# Altium PCB schematic.PcbDoc
Units mil, origin at the board's own origin, x right, y up, seen from the top; angles counter-clockwise.
Board outline 2165.35 x 2362.2 mil, 2 copper layers (Top, Bottom); 42 components, 51 nets, 219 pads, 216 vias.
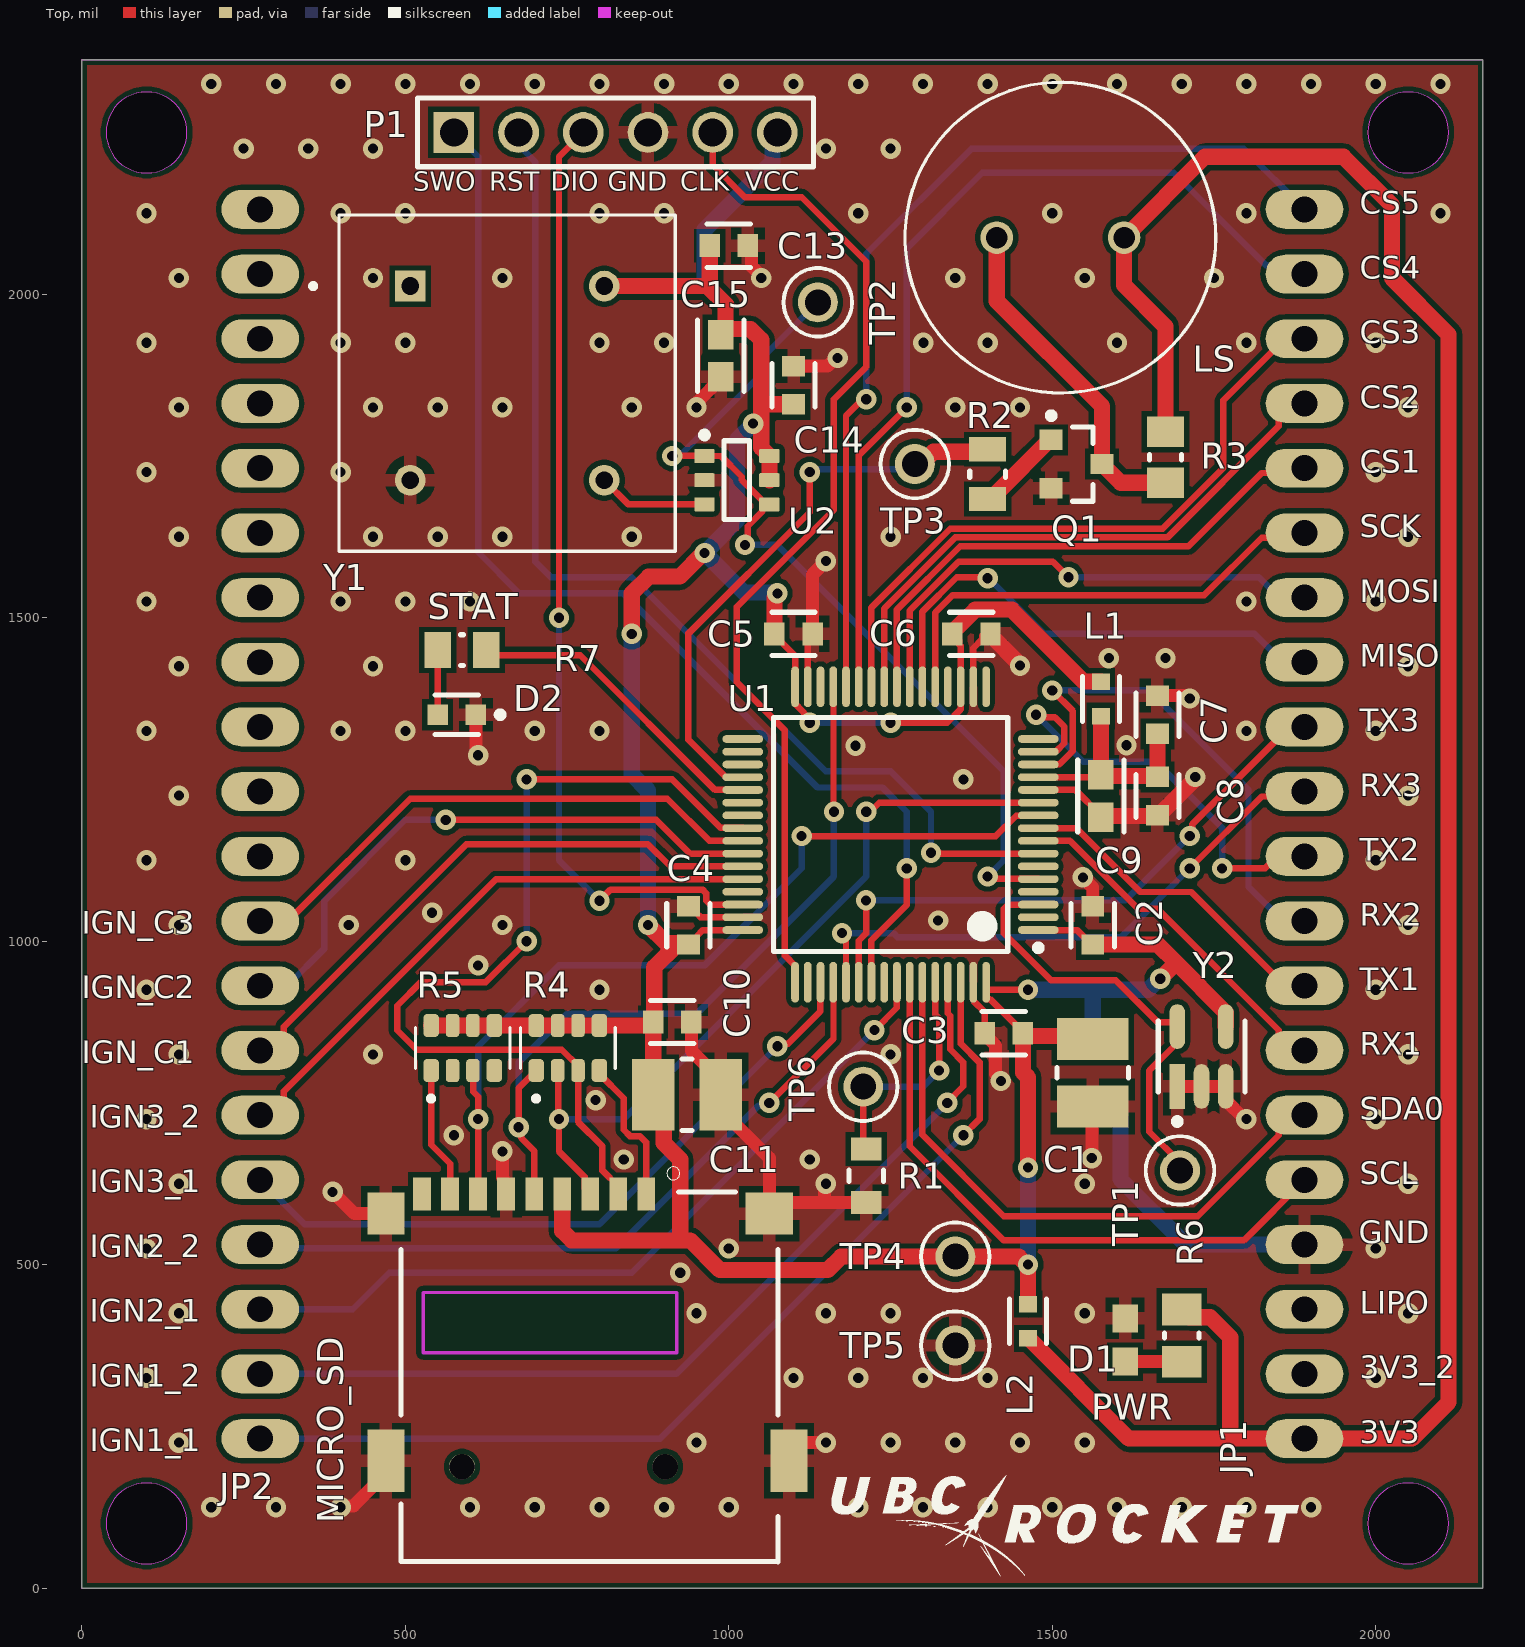
[diagram p0: Top view]
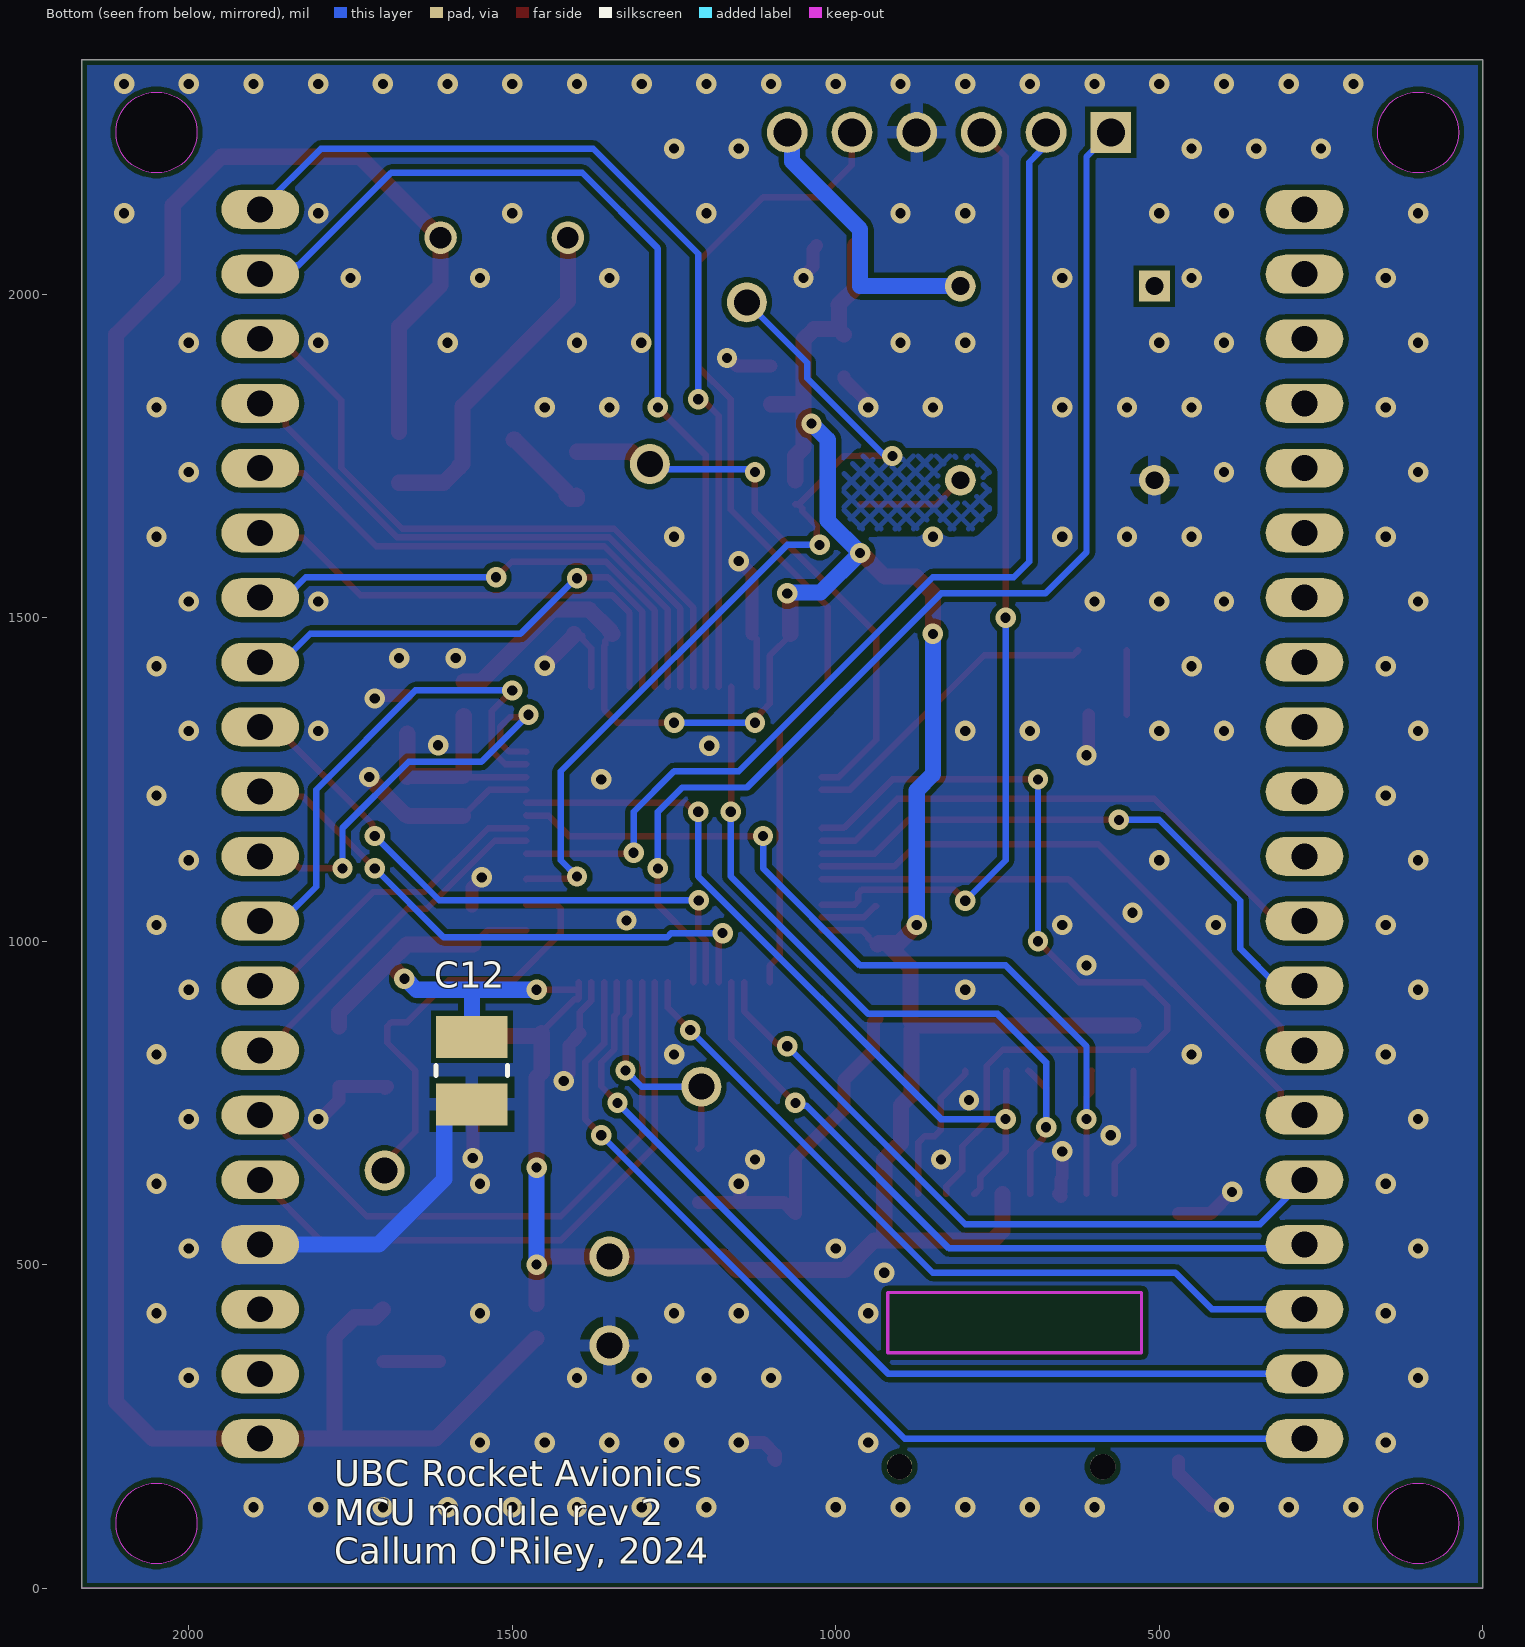
[diagram p1: Bottom view, seen from below]
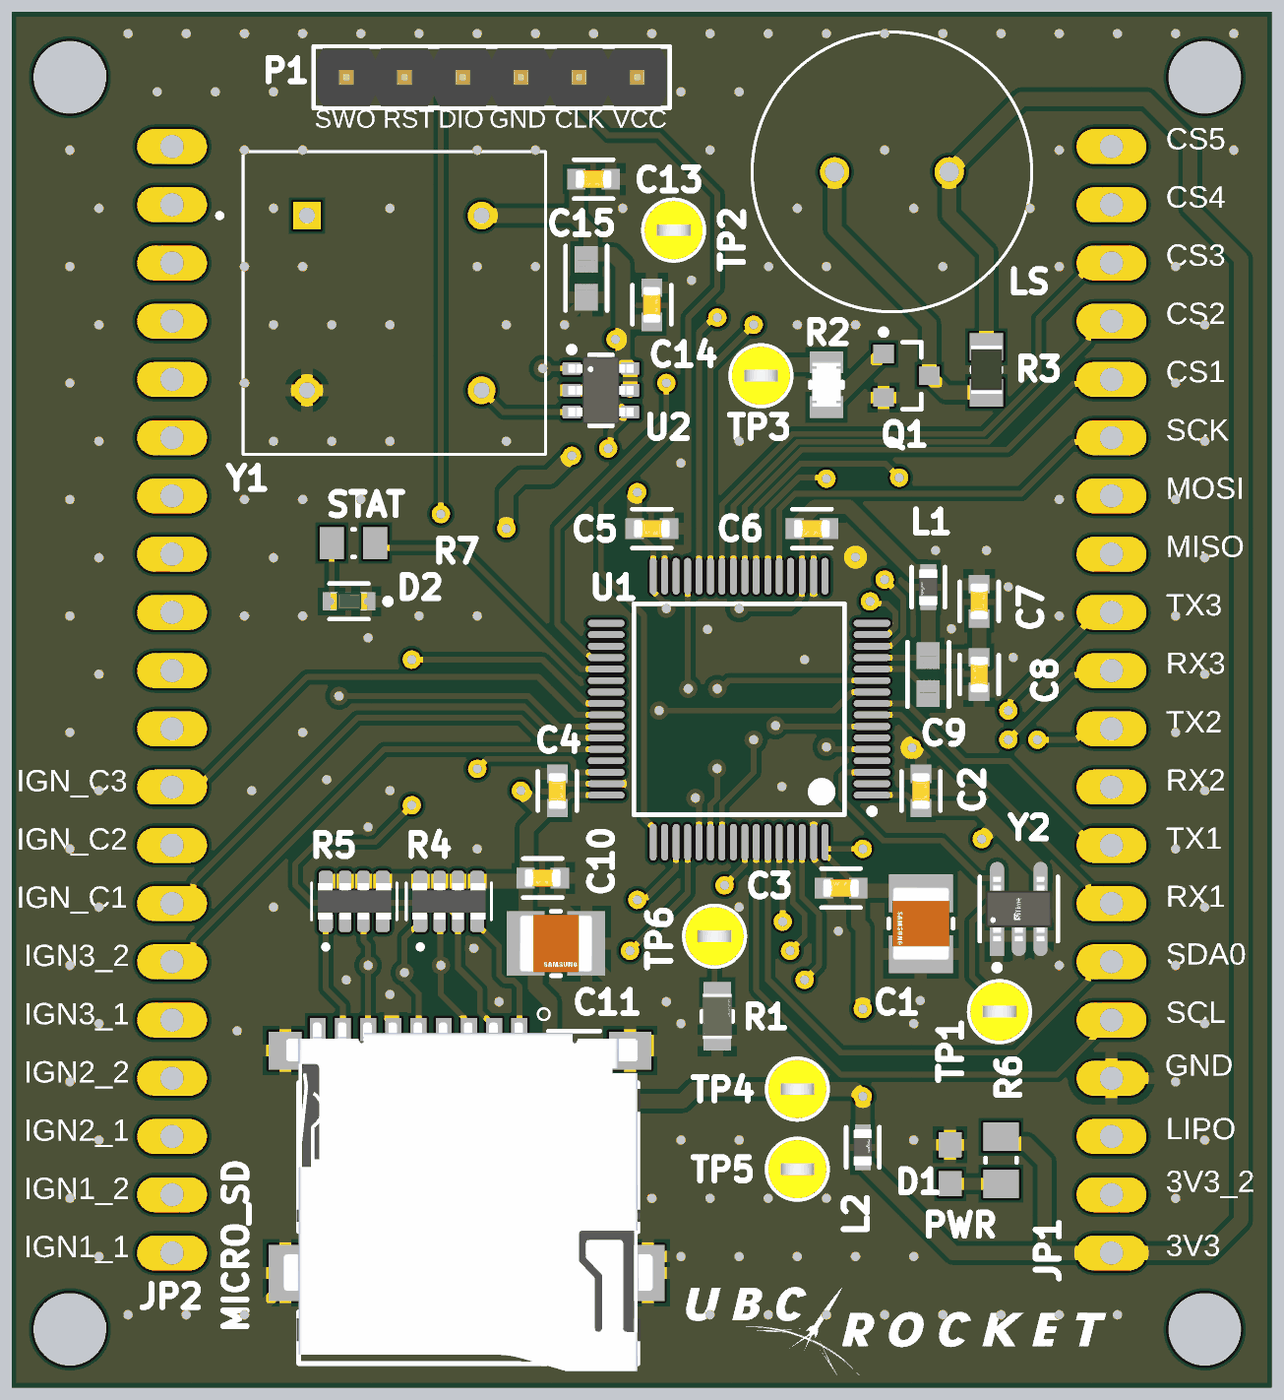
[diagram p2: 3D render of the assembled board from above, using the file's embedded part models]

## Layer stack, top to bottom
Top Solder: solder mask 0.4, Solder Resist, Dk 3.5
Top: signal copper 1.378
Dielectric 1: dielectric 12.6, FR-4, Dk 4.8
Bottom: signal copper 1.378
Bottom Solder: solder mask 0.4, Solder Resist, Dk 3.5

## Board outline
0,2362.2 0,0 2165.35,0 2165.35,2362.2
cut-out: 2050,2187.5 ccw(c2050,2250) 2112.5,2250 ccw(c2050,2250) 2050,2312.5 ccw(c2050,2250) 1987.5,2250 ccw(c2050,2250)
cut-out: 100,2187.5 ccw(c100,2250) 162.5,2250 ccw(c100,2250) 100,2312.5 ccw(c100,2250) 37.5,2250 ccw(c100,2250)
cut-out: 100,37.5 ccw(c100,100) 162.5,100 ccw(c100,100) 100,162.5 ccw(c100,100) 37.5,100 ccw(c100,100)
cut-out: 2050,37.5 ccw(c2050,100) 2112.5,100 ccw(c2050,100) 2050,162.5 ccw(c2050,100) 1987.5,100 ccw(c2050,100)

## Design rules (kind name [scope] priority, off if disabled: settings)
BoardOutlineClearance [All] p1: gap=7.87 ignorepadtopadclearanceinfootprint=FALSE except(15.75: Arc-SplitBarrior Arc-SplitContinuation Track-SplitBarrior Track-SplitContinuation SMDPad-SplitBarrior SMDPad-SplitContinuation THPad-SplitBarrior THPad-SplitContinuation Via-SplitBarrior Via-SplitContinuation Fill-SplitBarrior Fill-SplitContinuation Poly-SplitBarrior Poly-SplitContinuation Region-SplitBarrior Region-SplitContinuation Text-SplitBarrior Text-SplitContinuation)
Clearance "Clearance Bottom Layer" [OnLayer('Bottom Layer')] p1: gap=8 ignorepadtopadclearanceinfootprint=TRUE except(10: Arc-Text Track-Text SMDPad-Text THPad-Text Via-Text Fill-Text Poly-Text Region-Text Text-Text)
Clearance "Clearance Top Layer" [OnLayer('Top Layer')] p2: gap=8 ignorepadtopadclearanceinfootprint=TRUE except(10: Arc-Text Track-Text SMDPad-Text THPad-Text Via-Text Fill-Text Poly-Text Region-Text Text-Text)
Clearance [All] p3: gap=7.87 ignorepadtopadclearanceinfootprint=FALSE except(3.5: Arc-Arc Arc-Track Arc-SMDPad Track-Track Track-SMDPad SMDPad-SMDPad; 5: Arc-Via Track-Via SMDPad-Via THPad-Via Via-Via; 10: Arc-Text Track-Text SMDPad-Text THPad-Text Via-Text Fill-Text Poly-Text Region-Text Text-Text)
HoleSize [All] p1: absolutevalues=TRUE maxlimit=248.03 minlimit=7.87 maxpercent=80.000 minpercent=20.000
MinimumAnnularRing [All] p1: minimumring=3
MinimumSolderMaskSliver [All] p1: minsoldermaskwidth=3.94
PolygonConnect PolygonConnect_1 [All] p1: thpad.connectstyle=Relief thpad.reliefconductorwidth=20 thpad.reliefentries=4 thpad.polygonreliefangle="90 Angle" thpad.airgapwidth=15 smdpad.connectstyle=Relief smdpad.reliefconductorwidth=20 smdpad.reliefentries=4 smdpad.polygonreliefangle="90 Angle" smdpad.airgapwidth=10 via.connectstyle=Direct via.reliefconductorwidth=20 via.reliefentries=4 via.polygonreliefangle="90 Angle" via.airgapwidth=10
RoutingCorners [All] p1: cornerstyle=Round minsetback=100 maxsetback=100
RoutingVias [All] p1: holewidth=19.68 width=39.37 viastyle="Through Hole" minholewidth=7.87 minwidth=17.72 maxholewidth=39.37 maxwidth=78.74
SilkToSilkClearance [All] p1: silktosilkclearance=3.94
SilkToSolderMaskClearance [IsPad] p1: minsilkscreentomaskgap=3.94 clearancetoexposedcopper=TRUE
SolderMaskExpansion [All] p1: expansion=4 istentingtop=FALSE
Width [All] p1: maxlimit=100 minlimit=3.5 preferedwidth=15
25 further rules are at their usual default settings.

## Classes and differential pairs
component class microSD: C10 C11 MICRO_SD R4 R5
component class schematic: JP1 JP2 L2
component class MCU: 30mil C1 C2 C3 C4 C5 C6 C7 C8 C9 C12 C13 C14 C15 D1 D2 L1 LS P1 Q1 R1 R2 R3 R6 R7 TP1 TP2 TP3 TP4 TP5 TP6 U1 U2 Y1 Y2

## Components (designator, comment, footprint, x,y, rotation, side; value= is the part's Value field where it differs from the comment)
C1 "CL32B106KAJNNNE" FP-CL32-IPC_B 1562.5,796.6 r270 top
C2 "CC0603KRX7R9BB104" FP-CC0603-DA-MFG 1562.5,1024.42 r90 top value="100 nF"
C3 "CC0603KRX7R9BB104" FP-CC0603-DA-MFG 1425,857.69 r180 top value="100 nF"
C4 "CC0603KRX7R9BB104" FP-CC0603-DA-MFG 937.5,1024.42 r90 top value="100 nF"
C5 "CC0603KRX7R9BB104" FP-CC0603-DA-MFG 1100,1475 r0 top value="100 nF"
C6 "CC0603KRX7R9BB104" FP-CC0603-DA-MFG 1375,1475 r0 top value="100 nF"
C7 "CC0603KRX7R9BB104" FP-CC0603-DA-MFG 1662.5,1350 r90 top value="100 nF"
C8 "CC0603KRX7R9BB103" FP-CC0603-DA-MFG 1662.5,1224.42 r270 top value="10 nF"
C9 "CL10A105KO8NNNC" FP-CL10-IPC_A 1575,1224.42 r270 top
C10 "CC0603KRX7R9BB104" FP-CC0603-DA-MFG 912.5,875 r0 top value="100 nF"
C11 "CL32B106KAJNNNE" FP-CL32-IPC_B 935.33,762.5 r0 top
C12 "CL32B106KAJNNNE" FP-CL32-IPC_B 1562.5,800 r270 bottom
C13 "CC0603KRX7R9BB103" FP-CC0603-DA-MFG 1000,2075 r0 top value="10 nF"
C14 "CC0603KRX7R9BB103" FP-CC0603-DA-MFG 1100,1859.32 r90 top value="10 nF"
C15 "CL10A105KO8NNNC" FP-CL10-IPC_A 987.5,1904.94 r270 top
D1 "LTST-C191KRKT" 0603 1612.5,383.46 r270 top
D2 "LTST-C191KGKT" FP-LTST-C191KGKT-MFG 579.53,1350 r180 top
JP1 "PINHD-1X20" 1X20 1889.76,1181.1 r90 top
JP2 "PINHD-1X20" 1X20 275.59,1181.1 r90 top
L1 "BLM18EG601SN1D" FP-BLM18-0_15-t0_8-MFG 1575,1374.42 r270 top
L2 "BLM18EG601SN1D" FP-BLM18-0_15-t0_8-MFG 1462.5,412.5 r90 top
LS "PS1240P02BT" XDCR_PS1240P02BT 1512.5,2087.5 r0 top
MICRO_SD "TF-01A" TF-01A 784.56,326.77 r0 top
P1 "61300611121" 61300611121 825,2250 r0 top
Q1 "MMBT4401LT1G" ONSC-SOT-23-3-318-08_V 1537.5,1737.5 r0 top
R1 "AC0805FR-0710KL" FP-AC0805-MFG 1212.5,637.5 r90 top value=10KΩ
R2 "CRCW0805220RFKEA" FP-CRCW0805-e3-MFG 1400,1721.95 r270 top
R3 "RC0805FR-071KL" RESC2013X60X35ML10T20 1675,1747.84 r90 top
R4 "YC164-JR-0747KL" RESCAXE80P320X160X70-8N 751.14,834.84 r90 top
R5 "YC164-JR-0747KL" RESCAXE80P320X160X70-8N 588.68,834.84 r90 top
R6 "CRCW0805130RFKEA" RESC2013X50X30ML20T20 1700,390.35 r90 top
R7 "110R 5% 0805(2012)" RESC0805(2012)_N 587.5,1450 r0 top value="110.00 Ohm"
TP1 "5004" FP-5004-MFG 1697.32,645.57 r0 top
TP2 "5004" FP-5004-MFG 1137.5,1987.5 r0 top
TP3 "5004" FP-5004-MFG 1287.5,1737.5 r0 top
TP4 "5004" FP-5004-MFG 1350,512.5 r0 top
TP5 "5004" FP-5004-MFG 1350,375 r0 top
TP6 "5004" FP-5004-MFG 1207.77,775 r0 top
U1 "STM32L476RCT6" STM-LQFP64_L 1250,1164.86 r180 top
U2 "OPA357AIDBVR" DBV0006A_L 1012.5,1712.5 r0 top
Y1 "ACHL-8.000MHZ-EK" XTAL_ACHL-8.000MHZ-EK 657.47,1862.5 r0 top
Y2 "SIT1630AI-S4-DCC-32.768E" FP-SiT1630-S-IPC_A 1730.6,821.76 r90 top

## Footprints (in the part's own frame and the unit in brackets; to place one, negate y for a bottom-side part, rotate by r counter-clockwise, add the part's x,y. Pads: shape width x height; smd on the part's side, far side on the other; paste and mask are expansions set on the pad)
1X20 [mil] "1X20"
  oval 60x120 hole 40: 1(-950,0) 2(-850,0) 3(-750,0) 4(-650,0) 5(-550,0) 6(-450,0) 7(-350,0) 8(-250,0) 9(-150,0) 10(-50,0) 11(50,0) 12(150,0) 13(250,0) 14(350,0) 15(450,0) 16(550,0) 17(650,0) 18(750,0) 19(850,0) 20(950,0)
0603 [mm]
  rect 1.1x1 smd: 1(-0.85,0) 2(0.85,0)
61300611121 [mm] "Pin Header, pitch 2.54 mm, THT, Vertical, single row, 6p"
  rect 1.6x1.6 hole 1.1: 1(-6.35,0)
  round 1.6 hole 1.1: 2(-3.81,0) 3(-1.27,0) 4(1.27,0) 5(3.81,0) 6(6.35,0)
  silkscreen extent -7.77,-1.35 7.77,1.35, body extent -7.62,-1.27 7.62,1.27, height 8.57
DBV0006A_L [mm] "SOT23, 6-Leads, Body 3.05x1.75mm, Pitch 0.95mm, IPC High Density"
  rrect18% 0.8x0.55 smd: 1(-1.275,0.95) 2(-1.275,0) 3(-1.275,-0.95) 4(1.275,-0.95) 5(1.275,0) 6(1.275,0.95)
  silkscreen extent -1.4,-1.55 0.5,1.9, body extent -1.42,-1.46 1.42,1.46, height 1.11
FP-5004-MFG [mm]
  round 1.57 hole 1.02 paste-1000 mask+0: 1(0,0)
  silkscreen extent -1.35,-1.34 1.35,1.34, body extent -1.45,-1.45 1.45,1.45, height 0.25
FP-AC0805-MFG [mm]
  rect 0.9x1.2 smd paste+0 mask+0: 1(-1.05,0) 2(1.05,0)
  silkscreen extent -0.23,-0.67 0.23,0.67, body extent -1.6,-0.77 1.6,0.77, height 0.25
FP-BLM18-0_15-t0_8-MFG [mm]
  rect 0.65x0.7 smd paste+0 mask+0: 1(-0.675,0) 2(0.675,0)
  silkscreen extent -0.87,-0.72 0.87,0.72, body extent -1.1,-0.58 1.1,0.58, height 0.25
FP-CC0603-DA-MFG [mm]
  rect 0.8x0.9 smd paste+0 mask+0: 1(-0.75,0) 2(0.75,0)
  silkscreen extent -0.85,-0.85 0.85,0.85, body extent -1.35,-0.75 1.35,0.75, height 0.25
FP-CL10-IPC_A [mil]
  rect 45.6x39.85 smd paste+0 mask+0: 1(-32.56,0) 2(32.56,0)
  silkscreen extent -55,-36 55,36, body extent -75,-40 75,40, height 10
FP-CL32-IPC_B [mil]
  rect 65.06x110.4 smd paste+0 mask+0: 1(-52.17,0) 2(52.18,0)
  silkscreen extent -8,-55 8,55, body extent -95,-65 95,65, height 10
FP-CRCW0805-e3-MFG [mm]
  rect 0.95x1.45 smd paste+0 mask+0: 1(-0.975,0) 2(0.975,0)
  silkscreen extent -0.13,-0.7 0.13,0.7, body extent -1.55,-0.82 1.55,0.82, height 0.25
FP-LTST-C191KGKT-MFG [mm]
  rect 0.8x0.8 smd paste+0 mask+0: 1(-0.75,0) 2(0.75,0)
  silkscreen extent -1.83,-0.77 0.85,0.77, body extent -1.25,-0.55 1.25,0.55, height 0.25
FP-SiT1630-S-IPC_A [mm]
  rect 1.755x0.612 smd paste+0 mask+0: 1(-1.175,0.95)
  rrect100% 1.755x0.612 smd paste+0 mask+0: 2(-1.175,0) 3(-1.175,-0.95) 4(1.175,-0.95) 5(1.175,0.95)
  silkscreen extent -2.68,-1.7 1.4,1.7, body extent -2.55,-1.95 2.55,1.95, height 0.25
ONSC-SOT-23-3-318-08_V [mm] "SOT23, 3-Leads, Body 2.92x1.3mm, Pitch 0.95mm"
  rect 0.9x0.8 smd: 1(-1,0.95) 2(-1,-0.95) 3(1,0)
  silkscreen extent -1.12,-1.46 0.65,2.02, body extent -0.65,-1.46 0.65,1.46, height 1.11
RESC0805(2012)_N [mm] "Chip Resistor, Body 2.0x1.3mm, IPC Medium Density"
  rect 1.05x1.4 smd: 1(-0.95,0) 2(0.95,0)
  silkscreen extent -0.05,-0.6 0.05,0.6, body extent -1.1,-0.67 1.1,0.68, height 0.7
RESC2013X50X30ML20T20 [mm] "Chip Resistor, 2-Leads, Body 2.00x1.25mm, IPC Low Density"
  rect 1.25x1.55 smd: 1(-1.025,0) 2(1.025,0)
  silkscreen extent -0.1,-0.67 0.1,0.67, body extent -1.1,-0.72 1.1,0.72, height 0.5
RESC2013X60X35ML10T20 [mm] "Chip Resistor, 2-Leads, Body 2.1x1.35mm, IPC Low Density"
  rect 1.2x1.45 smd: 1(-1,0) 2(1,0)
  silkscreen extent -0.1,-0.63 0.1,0.63, body extent -1.05,-0.68 1.05,0.67, height 0.6
RESCAXE80P320X160X70-8N [mm]
  rrect50% 0.9x0.61 smd: 1(-0.885,1.24) 4(-0.885,-1.24) 5(0.885,-1.24) 8(0.885,1.24)
  rrect50% 0.9x0.53 smd: 2(-0.885,0.4) 3(-0.885,-0.4) 6(0.885,-0.4) 7(0.885,0.4)
  silkscreen extent -2.08,-1.86 0.8,1.86, body extent -0.8,-1.6 0.8,1.6, height 0.7
STM-LQFP64_L [mm] "QFP, 64-Leads, Body 10x10mm, Pitch 0.5mm, IPC High Density"
  oval 1.6x0.3 smd: 1(-5.8,3.75) 2(-5.8,3.25) 3(-5.8,2.75) 4(-5.8,2.25) 5(-5.8,1.75) 6(-5.8,1.25) 7(-5.8,0.75) 8(-5.8,0.25) 9(-5.8,-0.25) 10(-5.8,-0.75) 11(-5.8,-1.25) 12(-5.8,-1.75) 13(-5.8,-2.25) 14(-5.8,-2.75) 15(-5.8,-3.25) 16(-5.8,-3.75) 33(5.8,-3.75) 34(5.8,-3.25) 35(5.8,-2.75) 36(5.8,-2.25) 37(5.8,-1.75) 38(5.8,-1.25) 39(5.8,-0.75) 40(5.8,-0.25) 41(5.8,0.25) 42(5.8,0.75) 43(5.8,1.25) 44(5.8,1.75) 45(5.8,2.25) 46(5.8,2.75) 47(5.8,3.25) 48(5.8,3.75)
  oval 0.3x1.6 smd: 17(-3.75,-5.8) 18(-3.25,-5.8) 19(-2.75,-5.8) 20(-2.25,-5.8) 21(-1.75,-5.8) 22(-1.25,-5.8) 23(-0.75,-5.8) 24(-0.25,-5.8) 25(0.25,-5.8) 26(0.75,-5.8) 27(1.25,-5.8) 28(1.75,-5.8) 29(2.25,-5.8) 30(2.75,-5.8) 31(3.25,-5.8) 32(3.75,-5.8) 49(3.75,5.8) 50(3.25,5.8) 51(2.75,5.8) 52(2.25,5.8) 53(1.75,5.8) 54(1.25,5.8) 55(0.75,5.8) 56(0.25,5.8) 57(-0.25,5.8) 58(-0.75,5.8) 59(-1.25,5.8) 60(-1.75,5.8) 61(-2.25,5.8) 62(-2.75,5.8) 63(-3.25,5.8) 64(-3.75,5.8)
  silkscreen extent -5.93,-4.6 4.6,4.6, body extent -5,-5 5,5, height 1.6
TF-01A [mm]
  rect 0.7x1.3 smd: 1(2.23,7.174) 2(1.13,7.174) 3(0.03,7.174) 4(-1.07,7.174) 5(-2.17,7.174) 6(-3.27,7.174) 7(-4.37,7.174) 8(-5.47,7.174) CD1(-6.57,7.174)
  rect 1.448x1.651 smd: MP1(-7.989,6.4)
  rect 1.448x2.438 smd: MP2(-7.989,-3.3) MP3(7.836,-3.3)
  rect 1.854x1.651 smd: MP4(7.061,6.4)
  round 1 hole 1 unplated: ""(-5.004,-3.531) ""(2.972,-3.531)
  Keep-Out Layer lines w0.127: -6.528,0.94 -6.528,3.302 3.429,3.302 3.429,0.94 -6.528,0.94
  silkscreen extent -7.4,-7.26 7.4,8.24, body extent -8.05,-7.58 8.05,7.62, height 2
XDCR_PS1240P02BT [mm]
  round 1.28 hole 0.85: 1(-2.5,0) 2(2.5,0)
  silkscreen extent -6.1,-6.1 6.1,6.1
XTAL_ACHL-8.000MHZ-EK [mm]
  rect 1.208x1.208 hole 0.7: 1(-3.81,3.81)
  round 1.208 hole 0.7: 4(-3.81,-3.81) 5(3.81,-3.81) 8(3.81,3.81)
  silkscreen extent -7.72,-6.6 6.6,6.6

## Part data
C1 C11 C12: library part CMP-13271-001383-1, "Cap Ceramic 10uF 25V X7R ±10% SMD 1210 +125°C Embossed T/R", Capacitance=10uF, Case Code (Imperial)=1210, Case Code (Metric)=3225, Dielectric=X7R, LCSC Part #=C39232, Max Operating Temperature=125°C, Min Operating Temperature=-55°C, Package Quantity=1000, Tolerance=10%, Voltage=25V, Case/Package=1210, Contact Plating=Tin, Depth=2.5mm, Height=2.5mm, Length=3.2mm, Material=Ceramic, Mount="Surface Mount", Packaging="Tape and Reel", Radiation Hardening=No, Thickness=0.106inch, Voltage Rating=25V, Width=0.098inch
C2 C3 C4 C5 C6 C7 C10: library part CMP-2100-03601-2, "CAP CER 0.1UF 50V X7R 0603", Capacitance="100 nF", LCSC Part #=C14663, Manufacturer=YAGEO, Package=CC0603-DA, Temperature="-55°C to +125°C", Temperature Characteristic=X7R, Temperature Coefficient=15%, Temperature Range High=+125°C, Temperature Range Low=-55°C, Tolerance=0.1, Voltage="50 V", Automotive=No, Category=Cap, ComponentLink2Description=Datasheet, ComponentLink2URL=http://www.yageo.com/documents/recent/UPY-GPHC_X7R_6.3V-to-50V_18.pdf, Device Class L1="Passive Components", Device Class L2=Capacitors, Device Class L3="Ceramic Capacitors", Digikey Description="CAP CER 0.1UF 50V X7R 0603", Footprint Url=http://www.yageo.com/exep/pages/download/literatures/UPY-C_GEN_24.pdf, Height=0.9mm, Lead Free=Yes, Manufacturer Part Number=CC0603KRX7R9BB104, Material=Ceramic, Mouser Description="Multilayer Ceramic Capacitor, CC Series, 0.1 - F, - 10%, X7R, 50 V, 0603 [1608 Metric]", Octopart=https://octopart.com/cc0603krx7r9bb104-yageo-42244635, RoHS=TRUE, Voltage Rating="50 V"
C8 C13 C14: library part CMP-2100-03600-2, "CAP CER 10000PF 50V X7R 0603", Capacitance="10 nF", LCSC Part #=C100042, Manufacturer=YAGEO, Package=CC0603-DA, Temperature="-55°C to +125°C", Temperature Characteristic=X7R, Temperature Coefficient=15%, Temperature Range High=+125°C, Temperature Range Low=-55°C, Tolerance=0.1, Voltage="50 V", Automotive=No, Category=Cap, ComponentLink2Description=Datasheet, ComponentLink2URL=http://www.yageo.com/documents/recent/UPY-GPHC_X7R_6.3V-to-50V_18.pdf, Device Class L1="Passive Components", Device Class L2=Capacitors, Device Class L3="Ceramic Capacitors", Digikey Description="CAP CER 10000PF 50V X7R 0603", Footprint Url=http://www.yageo.com/exep/pages/download/literatures/UPY-C_GEN_24.pdf, Height=0.9mm, Lead Free=Yes, Manufacturer Part Number=CC0603KRX7R9BB103, Material=Ceramic, Mouser Description="Multilayer Ceramic Capacitor, CC Series, 0.01 - F, - 10%, X7R, 50 V, 0603 [1608 Metric]", Octopart=https://octopart.com/cc0603krx7r9bb103-yageo-192938, RoHS=TRUE, Voltage Rating="50 V"
C9 C15: library part CMP-13271-001457-1, "Cap Ceramic 1uF 16V X5R ±10% Pad SMD 0603 +85°C T/R", Capacitance=1uF, Case Code (Imperial)=0603, Case Code (Metric)=1608, Dielectric=X5R, LCSC Part #=C1592, Max Operating Temperature=85°C, Min Operating Temperature=-55°C, Package Quantity=1, Tolerance=10%, Voltage=16V, Case/Package=0603, Contact Plating=Tin, Depth=0.8mm, Height=0.8mm, Lead Free="Lead Free", Length=1.6mm, Material=Ceramic, Mount="Surface Mount", Packaging="Tape and Reel", Radiation Hardening=No, Thickness=0.035inch, Voltage Rating=16V, Voltage Rating (DC)=16V, Width=0.031inch
D1: "http://octopart.com/ltst-c190krkt-lite-on-549893", LCSC Part #=C125099, Package=None, Availability=Unavailable, MP=LTST-C191KRKT, Price=None
D2: library part CMP-2000-05198-2, "LED GREEN CLEAR SMD", Case Code (Imperial)=0603, Case Code (Metric)=1608, Color=Green, Forward Current=30mA, Forward Voltage=2V, LCSC Part #=C125098, Lens Color=Colorless, Max Operating Temperature=85°C, Max Power Dissipation=75mW, Min Operating Temperature=-55°C, Package Quantity=1, Reverse Voltage=5V, Test Current=20mA, Case/Package=0603, Depth=0.8mm, Dominant Wavelength=571nm, Height=0.55mm, Illumination Color=Green, Lead Free="Lead Free", Length=1.6mm, Lens Style=Rectangular, Lens Transparency=Clear, Luminous Intensity=35mcd, Mount="Surface Mount", Number of Elements=1, Number of LEDs=1, Number of Pins=2, Packaging="Tape and Reel", Power Dissipation=75mW, Power Rating=75mW, Radiation Hardening=No, Viewing Angle=130°, Wavelength=574nm, Width=0.8mm
JP1 JP2: "PIN HEADER", DeviceSetName=PINHD-1X20, GateName_1=A, LibraryName=adafruit, SymbolName_1=PINHD20
L1 L2: library part CMP-0686-00354-3, "Chip Ferrite Bead, 0603, 600Ω @ 100MHz, 0.35Ω, 25%, 500mA", Case Code (Imperial)=0603, Case Code (Metric)=1608, Current Rating=500mA, DC Resistance (DCR)=350mR, Frequency=100MHz, LCSC Part #=C20345, Manufacturer Series=BLM18E, Max Operating Temperature=125°C, Min Operating Temperature=-55°C, Package Quantity=1, Tolerance=25%, Case/Package=0603, Contact Plating=Tin, Core Material=Ferrite, DC Current=500mA, DC Resistance-Max=350mR, Depth=0.8mm, Height=0.8mm, Impedance=600R, Lead Free="Lead Free", Length=1.6mm, Material=Steel, Max Current Rating=500mA, Max DC Current=500mA, Military Standard=Not, Number of Circuits=1, Number of Functions=1, Number of Lines=1, Number of Pins=2, Packaging="Tape and Reel", Radiation Hardening=No, REACH SVHC="No SVHC", Resistance=350mR, RoHS Compliant=Yes, Series=BLM18E, Shielding=Unshielded, Terminal Finish=Tin, Termination=SMD/SMT, Test Frequency=100MHz, Width=0.8mm
LS: "Buzzers Transducer, Externally Driven Piezo 3V 4kHz 60dB @ 3V, 10cm Through Hole PC Pins", Package="2020 TDK", Availability=Unavailable, MF=TDK, MP=PS1240P02BT, Price=None, SnapEDA_Link=https://www.snapeda.com/parts/PS1240P02BT/TDK/view-part/53420/?ref=snap
MICRO_SD: "Standard Card Edge Connectors", LCSC Part #=C91145, Package=Package, Availability="Not in stock", Check_prices=https://www.snapeda.com/parts/TF-01A/HRO+Electronics+Co.%252C+Ltd./view-part/?ref=eda, MF="HRO Electronics Co., Ltd.", MP=TF-01A, Price=None, SnapEDA_Link=https://www.snapeda.com/parts/TF-01A/HRO+Electronics+Co.%252C+Ltd./view-part/?ref=snap
P1: library part CMP-1502-01070-1, "THT Vertical Pin Header WR-PHD, Pitch 2.54 mm, Single Row, 6 pins", Contact Resistance=20mOhm, Manufacturer="Wurth Elektronik", Operating Temperature=-40to105degC, Rated Current=3A, Withstanding Voltage=500VAC, Working Voltage=250VAC, Datasheet URL=https://katalog.we-online.de/em/datasheet/6130xx11121.pdf, Gender=Male, Manufacturer URL=http://www.we-online.de, Mounting Technology=THT, Orientation=Vertical, Package Reference=61300611121, Packaging=Bag, Part Number=61300611121, Pin Number=6, Pitch=2.54mm, Publisher=WurthElektronik, Row Number=Single
Q1: library part CMP-1048-00545-1, "Switching Transistor, NPN Silicon, 3-Pin SOT-23, Pb-Free, Tape and Reel", LCSC Part #=C31776, Manufacturer="On Semiconductor", ComponentLink1Description="Manufacturer URL", ComponentLink1URL=http://www.onsemi.com/, ComponentLink2Description=Datasheet, ComponentLink2URL=http://www.onsemi.cn/pub_link/Collateral/MMBT4401LT1-D.PDF, ComponentLink3Description="Package Specification", ComponentLink3URL=http://www.onsemi.cn/pub_link/Collateral/318-08.PDF, DatasheetVersion="Rev. 10", fT Min (MHz)=250, IC Continuous (A)=0.6, Mounting Technology="Surface Mount", PackageDescription="3-Pin Small Outline Transistor, Body 2.92 x 1.3 mm, Pitch 0.95 mm", PackageReference=SOT-23-3-318-08, PackageVersion="Rev. AP, 11/2009", Packing="Tape and Reel", PartNumber=MMBT4401LT1G, Polarity=NPN, RoHS=TRUE
R1: library part CMP-2001-04480-2, "RES SMD 10K OHM 1% 1/8W 0805", LCSC Part #=C140868, Manufacturer=Yageo, Package=AC0805, Power Rating=1/8W, Resistance=10KΩ, Temperature="-55°C to +155°C", Temperature Range High=+155°C, Temperature Range Low=-55°C, Tolerance=0.01, Voltage Rating=150V, Automotive=Yes, Automotive Grade="Grade 0", Category=Res, ComponentLink2Description=Datasheet, ComponentLink2URL=http://www.yageo.com/documents/recent/PYu-AC_51_RoHS_L_6.pdf, Composition="Thick Film", Device Class L1="Passive Components", Device Class L2=Resistors, Device Class L3="Chip SMD Resistors", Digikey Description="RES SMD 10K OHM 1% 1/8W 0805", Footprint Url=http://www.yageo.com/exep/pages/download/literatures/PYu-R_Mount_10.pdf, Height=0.6mm, Ipc Land Pattern Name=RESC200125X50, Lead Free=Yes, Manufacturer Part Number=AC0805FR-0710KL, Mouser Description="Res Thick Film 0805 10K Ohm 1% 0.125W(1/8W) ±100ppm/C Epoxy Pad SMD Automotive T/R", Octopart=https://octopart.com/ac0805fr-0710kl-yageo-21711112, RoHS=TRUE, Series=AC
R2: library part CMP-2001-03682-2, "RES Thick Film, 220Ω, 1%, 0.125W, 100ppm/°C, 0805", Case Code (Imperial)=0805, Case Code (Metric)=2012, LCSC Part #=C844204, Max Operating Temperature=155°C, Max Power Dissipation=125mW, Min Operating Temperature=-55°C, Package Quantity=10, Resistance=220R, Temperature Coefficient=100ppm/°C, Tolerance=1%, Voltage Rating=150V, Case/Package=0805, Composition="Thick Film", Contact Plating=Tin, Depth=1.25mm, Features="Automotive AEC-Q200", Height=0.45mm, Lead Free="Lead Free", Length=2mm, Military Standard=Not, Mount="Surface Mount", Number of Terminations=2, Packaging="Tape and Reel", Power Rating=125mW, Radiation Hardening=No, Termination=SMD/SMT, Voltage Rating (DC)=150V, Weight=0.000194oz, Width=0.049inch
R3: library part CMP-2100-03671-1, "Chip Resistor, 1 KOhm, +/- 1%, 125 mW, -55 to 155 degC, 0805 (2012 Metric), RoHS, Tape and Reel", Case Code (Imperial)=0805, Case Code (Metric)=2012, LCSC Part #=C95781, Manufacturer=Yageo, Max Operating Temperature=155degC, Max Power Dissipation=125mW, Min Operating Temperature=-55degC, Package Description="2-Pin Surface Mounted Device, Body 2 x 1.25 mm", Package Quantity=1, Resistance=1KOhm, Temperature Coefficient=100ppm/degreesC, Tolerance=1%, Voltage Rating=150V, Case/Package=0805, Composition=ThickFilm, Datasheet URL=http://www.yageo.com/NewPortal/yageodocoutput?fileName=/pdf/R-Chip/PYu-RC_Group_51_RoHS_L_5.pdf, Datasheet Version="Rev. 5, 10/2016", Depth=1.25mm, Height=0.024inch, Lead Free=LeadFree, Length=0.079inch, Manufacturer URL=http://www.yageo.com/, Military Standard=Not, Number of Pins=2, Number of Terminations=2, Package Reference=0805, Packaging=TapeandReel, Power Rating=125mW, REACH SVHC=Unknown, RoHSCompliant=true, Termination=SMD/SMT, Voltage Rating (DC)=150V, Width=0.049inch
R4 R5: "47k Ohm Â±5% 62.5mW Power Per Element Isolated 4 Resistor Network/Array Â±200ppm/Â°C 1206 (3216 Metric), Convex, Long Side Terminals", LCSC Part #=C779384, Package="1206 Yageo", Check_prices=https://www.snapeda.com/parts/YC164-JR-0747KL/Yageo/view-part/?ref=eda, MF=Yageo, MP=YC164-JR-0747KL, SnapEDA_Link=https://www.snapeda.com/parts/YC164-JR-0747KL/Yageo/view-part/?ref=snap
R6: library part CMP-2001-04942-1, LCSC Part #=C3151699, Manufacturer="Vishay Dale", Part Number=CRCW0805130RFKEA
R7: library part CMP-1013-00051-1, "110R 0.125W 5% 0805 (2012 Metric)  SMD", Case-EIA=0805, Case-Metric=2012, LCSC Part #=C246036, Power="0.125 W", Tolerance="5 %", Technology=SMT
TP1 TP2 TP3 TP4 TP5 TP6: library part CMP-2000-05575-2, "PC TEST POINT MINIATURE YELLOW", Manufacturer=Keystone, Automotive=No, Category=Conn, ComponentLink2Description=Datasheet, ComponentLink2URL=https://www.keyelco.com/product-pdf.cfm?p=1313, Contact Material=Silver, Device Class L1=Connectors, Device Class L2=unset, Device Class L3=unset, Digikey Description="PC TEST POINT MINIATURE YELLOW", Height=4.72mm, Is Female=yes, Lead Free=Yes, Manufacturer Part Number=5004, Mouser Description="TEST POINT PC MINI .040\"D YELLOW", Number Of Contacts=1, Octopart=https://octopart.com/5004-keystone-28591, Package=5004, RoHS=TRUE
U1: library part CMP-1655-00010-2, "Ultra-Low-Power ARM Cortex-M4 32-bit MCU+FPU, 256 KB Flash, 128 KB Internal RAM, 51 I/Os, 64-Pin LQFP, -40 to 85 degC, Tray", I/Os (High Current)=51, LCSC Part #=C73245, Manufacturer=STMicroelectronics, Operating Frequency(F) (Processor speed) (MHz)=80, Package Description="64-Pin Low-profile Quad Flat Package, Body 10 x 10 mm, Pitch 0.5 mm", Package Reference=LQFP64, Supply Voltage(Vcc) min (V)=1.71, ComponentLink1Description="Manufacturer URL", ComponentLink1URL=http://www.st.com/, ComponentLink2Description=Datasheet, ComponentLink2URL=http://www.st.com/st-web-ui/static/active/en/resource/technical/document/datasheet/DM00108832.pdf, Core="ARM Cortex-M4", D/A Converter=2, DatasheetVersion="Rev. 4", FLASH Size (Prog) (kB)=256, Internal RAM Size (kB)=128, Mounting Technology="Surface Mount", Packing=Tray, PartNumber=STM32L476RCT6
U2: library part CMP-0018-00466-2, "250 MHz, Rail-to-Rail I/O, Single CMOS Operational Amplifier with Shutdown, 2.5 to 5.5 V, -40 to 125 degC, 6-pin SOT23 (DBV6), Green (RoHS & no Sb/Br)", LCSC Part #=C139385, Manufacturer="Texas Instruments", 2nd Harmonic(dBc)=75, 3rd Harmonic(dBc)=83, @ MHz=1, Acl, min stable gain(V/V)=1, BW @ Acl(MHz)=250, Code_JEDEC=MO-178, ComponentLink1Description="Manufacturer URL", ComponentLink1URL=http://www.ti.com/, ComponentLink2Description=Datasheet, ComponentLink2URL=http://www.ti.com/general/docs/lit/getliterature.tsp?genericPartNumber=OPA357&fileType=pdf, ComponentLink3Description="Package Specification", ComponentLink3URL=http://www.ti.com/litv/pdf/mpds026h, DatasheetVersion=SBOS235E, Diff Gain(%)=0.02, Diff Phase(deg)=0.09, Eco-Plan="Green (RoHS & no Sb/Br)", Iib(Max)(nA)=0.05, Io(Typ)(mA)=100, Iq per channel(Max)(mA)=7.5, Mounting Technology="Surface Mount", Number of Channels=1, PackageDescription="6-Pin Plastic Small Outline, Body 1.6 x 2.9 mm, Pitch 0.95 mm", PackageReference=DBV0006A, PackageVersion="4073253-5/K, 03/2006", PartNumber=OPA357AIDBVR, Rail-Rail="In, Out", Settling Time (0.1%)(Typ)(ns)=30, Slew Rate(Typ)(V/us)=150, Sub Family="High Output Current Amplifier (>=50mA), High Speed Amplifier (>=50MHz), Low Supply Voltage Amplifier (<=2.7V)", THD (Fc is 1 MHz)(Typ)(dB)=-74, Vio(Max)(mV)=8, Vn at Flatband(Typ)(nV/rtHz)=6.5, Vs(Max)(V)=5.5, Vs(Min)(V)=2.5
Y1: Package=None, Availability=Unavailable, MP=ACHL-8.000MHZ-EK, Price=None
Y2: library part CMP-25159-260193-1, "MEMS OSC XO 32.7680KHZ LVCMOS", RoHS Compliant=Yes

## Free pads (board coordinates)
  round 125 hole 125 unplated: MH1(100,100) MH2(2050,100) MH3(2050,2250) MH4(100,2250)

## Via types
v1: diameter 31.5, hole 15.75, Top to Bottom, tented both sides, 181 vias
v2: diameter 31.5, hole 15.75, Top to Bottom, 35 vias

## Nets (pads, with @x,y where several pads share a name; then routed paths per layer and width w, separated by ;. In a path a pad name is that pad's centre, name@x,y a point inside that pad or via, vN(x,y) a via of type N, cw(c..) or ccw(c..) an arc to the next point about the centre after c; other vN are vias at no path point)
3V3: JP1.1 L2.1 LS.2 R3.2 R6.2 | length 3696.8
  Top w25: L2.1 1463.48,385.93 1618.31,231.1 1775,231.1 ; R3.2 1675,1950 1610.93,2014.07 LS.2 1735.93,2212.5 1950,2212.5 2025,2137.5 2025,2025 2112.5,1937.5 2112.5,287.5 2056.1,231.1 JP1.1 1775,231.1 ; R6.2 1712.11,418.6 1743.9,418.6 1775,387.5 1775,231.1
3V3_2: JP1.2
BUZZ: R2.1 TP3.1 U1.36 | length 887.5
  Top w10: U1.36 995.57,1253.44 990.29,1258.72 990.1,1258.72 937.5,1311.32 937.5,1475.59 1125,1663.09 v2(1125,1725)
  Top w25: TP3.1 1297.46,1737.5 1316.36,1756.4 R2.1@1400,1756.4
  Bottom w10: v2(1125,1725) 1129.11,1729.11 1279.11,1729.11 TP3.1
CS1: JP1.16 U1.24 | length 839.8
  Top w10: U1.24 1259.84,1512.54 1357.81,1610.5 1710.5,1610.5 1823.61,1723.61 1882.27,1723.61 JP1.16
CS2: JP1.17 U1.25 | length 908.7
  Top w10: U1.25 1240.16,1514.06 1350.09,1624 1678.05,1624 1850.19,1796.15 1850.19,1808 1873.29,1831.1 JP1.17
CS3: JP1.18 U1.26 | length 1024.8
  Top w10: U1.26 1220.47,1515.59 1342.38,1637.5 1670.33,1637.5 1764.56,1731.73 1764.56,1835.9 1859.76,1931.1 JP1.18
CS4: JP1.19 U1.27 | length 1436.1
  Top w10: U1.27 1200.79,1750.79 v2(1275,1825)
  Bottom w10: v2(1275,1825) 1275,2070.6 1391.9,2187.5 1687.5,2187.5 1830.01,2044.99 1832.34,2044.99 1846.23,2031.1 JP1.19
CS5: JP1.20 U1.28 | length 1468.6
  Top w10: U1.28 1181.1,1811.92 1206.68,1837.5 v2(1212.5,1837.5)
  Bottom w10: v2@1212.5,1838.06 1212.5,2062.5 1375,2225 1795.86,2225 JP1.20
DAT1: MICRO_SD.8 R5.1 | length 202.9
  Top w10: R5.1 539.86,685.14 569.19,655.81 MICRO_SD.8
DAT2: MICRO_SD.1 R4.4 | length 229.8
  Top w10: R4.4 799.96,794.83 837.5,757.29 837.5,708.4 847.1,698.8 862.5,698.8 872.34,688.96 MICRO_SD.1
GND: C1.2 C2.2 C3.2 C4.2 C5.2 C6.2 C7.2 C8.2 C9.2 C10.2 C11.2 C12.2 C13.2 C14.2 C15.2 D1.1 D2.1 JP1.4 MICRO_SD.6 MICRO_SD.MP1 MICRO_SD.MP2 MICRO_SD.MP3 MICRO_SD.MP4 P1.4 Q1.2 R1.1 TP5.1 U1.12 U1.18 U1.31 U1.47 U1.63 U2.2 Y1.4 Y2.1 Y2.2 Y2.3 | length 2870.8
  Top w10: C4.2 939.47,1053.95 950.22,1043.2 950.22,1043.11 956.07,1037.26 1021.31,1037.26 U1.47 ; U1.31 1122.05,1467.52 C5.2 ; U1.63 1378.3,936.17 1378.3,907.58 1395.47,890.4 C3.2 ; U1.18 1377.95,1452.95 1392.03,1467.03 C6.2@1392.03,1472.45 ; U1.12 1535.97,1233.76 1575,1194.73 C9.2
  Top w20: v1(387.5,612.5) 421.26,578.74 MICRO_SD.MP1 ; v1(400,125) 402.2,127.2 419.89,127.2 470.04,177.35 MICRO_SD.MP2 ; D2.1 609.06,1290.94 v1(612.5,1287.5) ; v1(650,675) 650,634.38 652.03,632.35 652.03,612.98 MICRO_SD.6 MICRO_SD.6@652.2,605.6 ; C10.2@936.28,880.75 C10.2 942.03,830.64 987.5,785.17 C11.2 987.5,739.83 1062.56,664.78 MICRO_SD.MP4 1079.98,596.16 1146.24,596.16 ; v1(950,1825) 952.2,1827.2 952.2,1834.21 987.5,1869.51 C15.2 ; C13.2 1035.28,2069.25 1035.28,2042.84 1050,2028.11 v1(1050,2025) ; MICRO_SD.MP3@1096.22,200 MICRO_SD.MP3 1093.07,206.5 1111.57,225 v1(1150,225) ; C14.2 1152.51,1888.85 1165.06,1901.4 v1(1168.17,1901.4) ; C5.2 1129.53,1567.03 v1(1150,1587.5) ; v1(1150,625) 1147.8,622.8 1147.8,597.72 1146.24,596.16 ; R1.1 1146.24,596.16 ; C3.2 1401.22,851.94 1401.22,849.97 1412.5,838.69 1412.5,795.1 1420.54,787.06 v1(1420.54,783.95) ; v2(1547.3,1098.57) 1547.3,1097.99 1562.5,1082.79 C2.2 ; v1(1561.09,664.62) 1561.09,743.01 C1.2 ; C7.2 1704.86,1379.53 1709.39,1375 v1(1712.5,1375) ; Y2.1@1696.6,772.09 Y2.1 Y2.2 Y2.3 1768,754.09 1797.09,725 v1(1800,725)
  Top w25: C6.2 1404.53,1473.03 1450,1427.56 v2(1450,1425.88) v2@1450,1425 ; C9.2@1576.52,1193.38 1660.98,1193.38 C8.2 1664.47,1194.89 v1@1723.71,1254.13
  Bottom w25: C12.2 1585.17,747.83 1605.2,727.79 1605.2,632.3 1706.4,531.1 JP1.4
  other v1: 200,125 300,125 600,125 700,125 800,125 900,125 1000,125 1200,125 1300,125 1400,125 1500,125 1600,125 1700,125 1800,125 1900,125 150,225 950,225 1250,225 1350,225 1450,225 1550,225 100,325 1100,325 1200,325 1300,325 1400,325 2000,325 150,425 950,425 1150,425 1250,425 1550,425 2050,425 925,487.5 100,525 1000,525 2000,525 150,625 1550,625 2050,625 837.5,662.5 1125,662.5 575,700 100,725 2000,725 794.14,754.33 150,825 450,825 1250,825 2050,825 100,925 800,925 2000,925 612.5,962.5 150,1025 412.5,1025 650,1025 2050,1025 1323.46,1032 541.35,1043.86 100,1125 500,1125 2000,1125 150,1225 2050,1225 1362.5,1250 1721.03,1253.72 1195.71,1302.09 1614.69,1302.96 100,1325 400,1325 500,1325 700,1325 800,1325 1800,1325 2000,1325 150,1425 450,1425 2050,1425 1587.5,1437.5 1675,1437.5 100,1525 400,1525 500,1525 600,1525 1800,1525 2000,1525 150,1625 450,1625 550,1625 650,1625 850,1625 1250,1625 2050,1625 100,1725 400,1725 2000,1725 150,1825 450,1825 550,1825 650,1825 850,1825 1350,1825 1450,1825 2050,1825 100,1925 400,1925 500,1925 800,1925 900,1925 1300.75,1925 1400,1925 1600,1925 1800,1925 2000,1925 150,2025 450,2025 650,2025 1350,2025 1550,2025 1750,2025 100,2125 400,2125 500,2125 800,2125 900,2125 1200,2125 1500,2125 1800,2125 2100,2125 250,2225 350,2225 450,2225 1150,2225 1250,2225 200,2325 300,2325 400,2325 500,2325 600,2325 700,2325 800,2325 900,2325 1000,2325 1100,2325 1200,2325 1300,2325 1400,2325 1500,2325 1600,2325 1700,2325 1800,2325 1900,2325 2000,2325 2100,2325
IGN1_1: JP2.1 U1.62 | length 1540.1
  Top w10: U1.62 1358.27,841.73 1387.5,812.5 1387.5,725 v2(1362.5,700)
  Bottom w10: JP2.1 893.6,231.1 v2(1362.5,700)
IGN1_2: JP2.2 U1.61 | length 1442.2
  Top w10: v2(1337.5,750) 1337.5,750.56 1362.5,775.56 1362.5,812.5 1342.22,832.78 1342.22,884.81 1338.58,888.45 U1.61
  Bottom w10: JP2.2 918.6,331.1 v2(1337.5,750)
IGN2_1: JP2.3 U1.57 | length 1216.5
  Top w10: v2(1225,862.5) 1259.5,897 1259.5,936.17 U1.57
  Bottom w10: JP2.3 418.6,431.1 475,487.5 850,487.5 v2(1225,862.5)
IGN2_2: JP2.4 U1.52 | length 1110.4
  Top w10: v2(1062.5,750) 1161.76,849.26 1161.76,936.17 U1.52
  Bottom w10: JP2.4 281.69,525 825,525 1045.89,745.89 1058.39,745.89 v2(1062.5,750)
IGN3_1: JP2.5 U1.51 | length 1075.7
  Top w10: v2(1075,837.5) 1079.11,841.61 1091.61,841.61 1141.39,891.39 1141.39,936.17 U1.51
  Bottom w10: JP2.5 344.19,562.5 800,562.5 v2(1075,837.5)
IGN3_2: JP2.6 U1.44 | length 905.2
  Top w10: JP2.6 289.31,731.1 312.41,754.2 312.41,767.92 640.45,1095.96 U1.44
IGN_CHK1: JP2.7 U1.43 | length 900.4
  Top w10: JP2.7 289.31,831.1 312.41,854.2 312.41,867.92 594.49,1150 875,1150 909.35,1115.65 U1.43
IGN_CHK2: JP2.8 U1.42 | length 917.2
  Top w10: v1(562.5,1187.5) 887.5,1187.5 939.67,1135.33 U1.42
  Bottom w10: JP2.8 317.51,931.1 375,988.59 375,1062.5 500,1187.5 v1(562.5,1187.5)
IGN_CHK3: JP2.9 U1.41 | length 851.4
  Top w10: JP2.9 318.6,1031.1 507.76,1220.26 904.74,1220.26 969.98,1155.02 U1.41
LIPO: JP1.3
MISO: JP1.13 U1.22 | length 783.2
  Top w10: U1.22 1299.21,1509.48 1352.23,1562.5 1398.32,1562.5 v2(1400,1560.82)
  Bottom w10: v2(1400,1560.82) 1401.68,1560.82 1487.5,1475 1812.5,1475 1856.4,1431.1 JP1.13
MISO2: MICRO_SD.7 R5.3 U1.10 | length 1349.6
  Top w10: R5.3 604.95,799.48 604.95,767.28 612.5,759.73 v2(612.5,725) MICRO_SD.7 ; v1(1112.5,1162.5) 1412.5,1162.5 1444.04,1194.04 1478,1194.04 U1.10
  Bottom w10: v2(612.5,725) 612.5,837.5 737.5,962.5 750,962.5 962.5,962.5 1112.5,1112.5 v1(1112.5,1162.5)
MOSI: JP1.14 U1.23 | length 782.3
  Top w10: U1.23 1279.53,1511.01 1355.09,1586.57 1500.93,1586.57 v2(1525,1562.5)
  Bottom w10: v2(1525,1562.5) 1819.29,1562.5 1850.69,1531.1 JP1.14
MOSI2: MICRO_SD.3 R4.2 U1.11 | length 1213.7
  Top w10: R4.2 736.45,798.95 736.45,726.05 v2(737.5,725) 737.5,675 776.95,635.55 776.95,617.98 MICRO_SD.3 ; v1(1212.5,1200) 1218.32,1200 1232.39,1214.07 U1.11
  Bottom w10: v2(737.5,725) 837.5,725 1212.5,1100 v1(1212.5,1200)
NetC7_1: C7.1 C8.1 C9.1 L1.2 U1.13 | length 344.3
  Top w10: U1.13 1571.47,1253.44 C9.1
  Top w25: L1.2 C9.1 1576.52,1255.46 1660.98,1255.46 C8.1 C7.1
NetD1_2: D1.2 R6.1 | length 87.5
  Top w20: D1.2 R6.1
NetD2_2: D2.2 R7.1 | length 99.9
  Top w10: D2.2@550.06,1350.06 R7.1
NetLS_1: LS.1 Q1.3 R3.1 | length 528.7
  Top w25: LS.1 1414.07,1989.48 1576.87,1826.68 Q1.3 1578.84,1737.5 1582.09,1734.25 1582.09,1732.28 1605.9,1708.47 R3.1
NetQ1_1: Q1.1 R2.2 | length 140.7
  Top w25: R2.2 1409.84,1683.56 1416.04,1689.76 1416.04,1694.78 1496.16,1774.9 Q1.1 ; R2.2@1400,1687.5 R2.2@1401.24,1688.74
NetR1_2: R1.2 TP6.1 U1.60 | length 364.8
  Top w10: TP6.1 1207.77,683.57 R1.2 ; U1.60 1318.9,886.92 1325,880.82 v2(1325,800)
  Bottom w10: TP6.1 1300,775 v2(1325,800)
NetU2_3: U2.3 Y1.5 | length 170.3
  Top w10: Y1.5 844.88,1675.1 U2.3
NRST: P1.2 U1.7 | length 1664.4
  Top w10: v1@1325,1137.5 1327.17,1135.33 U1.7
  Bottom w10: P1.2 685.14,2239.86 685.14,2220.01 701.11,2204.04 701.11,1586.39 725,1562.5 850,1562.5 1150,1262.5 1250,1262.5 1312.5,1200 v1(1312.5,1136.75) v1@1311.75,1137.5
OSC: TP2.1 U1.5 U2.1 U2.4 | length 1402.1
  Top w10: v1(912.5,1750) v1(912.5,1750) 962.25,1749.95 U2.1 987.89,1749.9 1019.92,1717.87 1019.92,1712.95 U2.4@1057.78,1675.1 ; v2(1025,1612.5) 1029.11,1616.61 1029.11,1641.51 1051.95,1664.35 1051.95,1669.27 U2.4@1057.78,1675.1 ; U2.4 U2.4@1057.78,1675.1 ; TP2.1@1137.5,1980.86 TP2.1 ; v1(1400,1100) 1403.69,1096.31 1478,1096.31 U1.5
  Bottom w10: v1(912.5,1750) 916.61,1754.11 928.03,1754.11 1044.13,1870.21 1044.13,1894.13 TP2.1 ; v2(1025,1612.5) 1075,1612.5 1425,1262.5 1425,1125 v1(1400,1100)
OSC32: TP1.1 U1.3 Y2.5 | length 681.8
  Top w10: U1.3 1478,1056.25 1431.25,1056.25 1425,1050 1425,1012.5 1498.16,939.34 1598.16,939.34 1662.5,875 1686.69,875 1693.2,868.49 1693.2,843.2 1650,800 1650,705.47 1697.32,658.15 TP1.1
RX1: JP1.7 U1.8 | length 550.3
  Top w10: U1.8 1527.27,1155.02 1632.29,1050 1662.5,1050 1850.19,862.31 1850.19,854.2 1873.29,831.1 JP1.7
RX2: JP1.9 U1.14 | length 793.9
  Top w10: U1.14 1478.69,1273.48 1510.98,1273.48 1531.84,1294.34 1531.84,1355.66 v2(1500,1387.5)
  Bottom w10: v2(1500,1387.5) 1650,1387.5 1803.25,1234.25 1803.25,1084.25 1856.4,1031.1 JP1.9
RX3: JP1.11 U1.53 | length 919
  Top w10: v1(1175,1012.5) 1181.1,1006.4 U1.53 ; v2(1712.5,1112.5) 1823.61,1223.61 1882.27,1223.61 JP1.11
  Bottom w10: v1(1175,1012.5) 1254.35,1012.5 1260.59,1006.26 1606.26,1006.26 v2(1712.5,1112.5) ; JP1.11@1859.76,1231.1 JP1.11
SCK: JP1.15 U1.21 | length 736.6
  Top w10: U1.21 1318.9,1507.95 1345.95,1535 1735,1535 1823.61,1623.61 1882.27,1623.61 JP1.15
SCK2: MICRO_SD.5 R4.1 U1.29 | length 1212.7
  Top w10: MICRO_SD.5 699.56,609.65 699.56,675.44 679.11,695.89 679.11,708.39 v2(675,712.5) 675,772.68 R4.1 ; U1.29 1161.76,1392.86 1161.76,1200.74 v1(1162.5,1200)
  Bottom w10: v2(675,712.5) 675,812.5 750,887.5 950,887.5 1162.5,1100 v1(1162.5,1200)
SCL0: JP1.5 U1.58 | length 962.8
  Top w10: U1.58 1279.53,682.97 1425,537.5 1796.16,537.5 JP1.5
SD_CS: MICRO_SD.2 R4.3 U1.40 | length 1413.7
  Top w10: v2@683.39,1254.11 v2(687.5,1250) ; v2(687.5,1000) 624.25,936.75 524.25,936.75 487.5,900 487.5,862.5 517.73,832.27 741.9,832.27 766.89,807.28 R4.3 766.89,720.61 804.59,682.91 804.59,645.46 829.04,621.02 MICRO_SD.2 ; v2@700,1250 912.5,1250 987.45,1175.05 1021.31,1175.05 U1.40
  Bottom w10: v2(687.5,1000) v2(687.5,1250)
SDA0: JP1.6 U1.59 | length 947.6
  Top w10: U1.59 1299.21,700.79 1425,575 1725,575 1850.19,700.19 1850.19,708 1873.29,731.1 JP1.6
STAT_LED: R7.2 U1.37 | length 486.3
  Top w10: R7.2 632.84,1442.09 770.41,1442.09 978.74,1233.76 U1.37
SWCLK: P1.5 U1.49 | length 1583.2
  Top w10: P1.5 975,2200 1025,2150 1112.5,2150 1212.5,2050 1212.5,1887.5 1162.5,1837.5 1162.5,1667 1012.5,1517 1012.5,1400 1086.75,1325.75 1086.75,977.72 1102.36,962.11 U1.49
SWDIO: P1.3 U1.46 | length 1473.9
  Top w10: v2(737.5,1500) 737.5,2212.5 P1.3 ; v2(800,1062.5) 817.19,1079.69 959.36,1079.69 965.22,1073.84 965.22,1062.45 971.07,1056.59 U1.46
  Bottom w10: v2(737.5,1500) 737.5,1125 v2(800,1062.5)
SWO: P1.1 U1.55 | length 1779.2
  Top w10: U1.55 1220.47,1001.38 1275,1055.91 v1(1275,1112.5)
  Bottom w10: P1.1 612.5,2212.5 612.5,1601.09 676.09,1537.5 837.16,1537.5 1137.16,1237.5 1237.5,1237.5 1275,1200 v1(1275,1112.5)
TX1: JP1.8 U1.9 | length 512.3
  Top w10: U1.9 1537.41,1174.7 1636.12,1076 1714.86,1076 1859.76,931.1 JP1.8
TX2: JP1.10 U1.15 | length 679.7
  Top w10: v2(1474.94,1349.99) 1479.04,1345.89 1504.11,1345.89 1518.34,1331.66 1518.34,1305.84 1505.66,1293.16 1478.69,1293.16 U1.15 ; v2(1762.5,1112.5) 1828.9,1112.5 1847.5,1131.1 JP1.10
  Bottom w10: v2(1474.94,1349.99) 1475.01,1349.99 1547.79,1277.21 1660.29,1277.21 1762.5,1175 v2(1762.5,1112.5)
TX3: JP1.12 U1.54 | length 928.8
  Top w10: U1.54 1200.79,1000.79 1212.5,1012.5 1212.5,1062.5 v1(1211.96,1063.04) ; v2(1712.5,1162.5) 1716.61,1166.61 1716.61,1180.95 1866.77,1331.1 JP1.12
  Bottom w10: v1(1211.96,1063.04) 1613.04,1063.04 v2(1712.5,1162.5)
VCC: C1.1 C2.1 C3.1 C4.1 C5.1 C6.1 C10.1 C11.1 C12.1 C13.1 C14.1 C15.1 L1.1 L2.2 MICRO_SD.4 P1.6 R4.5 R4.6 R4.7 R4.8 R5.5 R5.6 R5.7 R5.8 TP4.1 U1.1 U1.19 U1.32 U1.48 U1.64 U2.5 U2.6 Y1.8 Y2.4 | length 6196.2
  Top w10: C4.1@939.47,994.89 950.22,1005.64 950.22,1007.61 959.83,1017.22 U1.48 ; C5.1 1070.47,1473.03 1102.36,1441.14 U1.32 1102.36,1367.13 1107.64,1361.85 1107.64,1361.65 1116.65,1352.64 1116.65,1351.66 1125,1343.32 v1(1125,1337.5) ; v1(1250,1337.5) 1337.5,1337.5 1358.16,1358.16 1358.16,1393.1 U1.19 1358.27,1456.43 1356.22,1458.47 1356.22,1464.25 C6.1 ; U1.64 U1.64@1397.64,925.84 ; C3.1 1454.53,859.66 1403.6,910.58 1398.47,910.58 1397.64,911.42 U1.64@1397.64,925.84 ; v2(1462.5,925) 1398.47,925 U1.64@1397.64,925.84 ; U1.1 1538.2,1017.22 C2.1@1560.53,994.89
  Top w25: R5.8 R5.7 R5.6 R5.5 R4.8 R4.7 R4.6 R4.5 875.88,869.68 883.06,862.5 883.06,762.59 C11.1 899.46,746.19 899.46,688.04 925,662.5 925,537.5 ; MICRO_SD.4 742.42,552.14 757.07,537.5 925,537.5 ; Y1.8 967.03,2012.5 ; v2(850,1475) 850,1537.5 875.9,1563.4 924.14,1563.4 960.74,1600 v2(962.5,1600) ; v2(875,1025) 903.06,996.94 933.48,996.94 C4.1@935.53,994.89 ; C10.1@884.74,876.76 884.74,959.74 C4.1@919.89,994.89 ; C13.1 970.47,2015.94 967.03,2012.5 ; C15.1 994.92,1944.92 C15.1@994.92,1946.01 ; U2.5 U2.6 1050,1762.6 1050,1825 ; C5.1 1070.47,1531.21 1075,1535.74 v2(1075,1537.5) ; C14.1 1054.79,1829.79 1050,1825 ; C6.1 1348.72,1478.25 1348.72,1480.22 1381,1512.5 1437.5,1512.5 1548.71,1401.29 1574.7,1401.29 L1.1 ; C3.1 C3.1@1454.53,856.48 ; L2.2 v2(1462.5,500) 1460.74,500 1448.24,512.5 TP4.1 1173.51,512.5 1152.76,491.75 986.23,491.75 940.48,537.5 925,537.5 ; v2(1462.5,650) 1462.5,789.26 1454.53,797.23 C3.1@1454.53,856.48 ; C2.1@1560.53,994.89 C2.1 1662.75,994.89 1691.32,966.32 ; C1.1 1558.05,853.23 1457.78,853.23 C3.1@1454.53,856.48 ; v2(1666.82,941.82) 1691.32,966.32 ; Y2.4 1768,889.64 1691.32,966.32 ; 967.03,2012.5 996.01,1983.51 994.92,1982.42 C15.1@994.92,1946.01 ; C15.1@994.92,1946.01 1033.51,1946.01 1050,1929.53 1050,1825
  Bottom w10: v1(1125,1337.5) v1(1250,1337.5)
  Bottom w25: Y1.8@803.16,2008.18 Y1.8 962.5,2012.5 962.5,2100 1067.73,2205.23 1067.73,2242.73 P1.6 ; v2(850,1475) 850,1257.94 875,1232.94 v2(875,1025) ; v2(1037.5,1800) 1012.5,1775 1012.5,1650 v2(962.5,1600) 1023.76,1538.74 1073.76,1538.74 v2(1075,1537.5) ; v2(1462.5,500) v2(1462.5,650) ; v2(1462.5,925) 1562.5,925 ; C12.1 1562.5,925 ; v2(1666.82,941.82) 1665.06,941.82 1648.24,925 1562.5,925
pads on no net: JP2.10 JP2.11 JP2.12 JP2.13 JP2.14 JP2.15 JP2.16 JP2.17 JP2.18 JP2.19 JP2.20 MICRO_SD. MICRO_SD.CD1 R5.2 R5.4 U1.2 U1.4 U1.6 U1.16 U1.17 U1.20 U1.30 U1.33 U1.34 U1.35 U1.38 U1.39 U1.45 U1.50 U1.56 Y1.1

## Polygon pours and split planes (outlines as drawn)
GND on Bottom "GND_L02_P006" (solid, remove dead copper, pour order 6): 0,2362.5 0,0 2162.5,0 2162.5,2362.5
OSC on Bottom "OSC_L02_P002" (hatched 45Degree grid 20 track 8, pour order 2): 787.5,1750 762.5,1725 762.5,1662.5 787.5,1637.5 962.5,1637.5 987.5,1662.5 987.5,1725 962.5,1750
GND on Top "GND_L01_P001" (solid, remove dead copper, pour order 1): 0,2362.5 0,0 2162.5,0 2162.5,2362.5

## Keep-outs
Keep-Out Layer:
  the board outline again, w0

## Other copper
Top:
  region: 1300,1312.5
  region: 1300,1312.5
  region: 1300,1312.5
  region: 1300,1312.5
  region: 1300,1312.5
  region: 1300,1312.5

## Silkscreen, mask and mechanical layers (free items; w line width, h text height)
Top Overlay:
  drawing of 34 lines, arcs and shapes, not listed
  text "SWO" at 512.5,2150 h50
  text "RST" at 630,2150 h50
  text "DIO" at 725,2150 h50
  text "GND" at 812.5,2150 h50
  text "CLK" at 925,2150 h50
  text "VCC" at 1025,2150 h50
  text "CS5" at 1975,2112.5 h60
  text "CS4" at 1975,2012.5 h60
  text "CS3" at 1975,1912.5 h60
  text "CS2" at 1975,1812.5 h60
  text "CS1" at 1975,1712.5 h60
  text "SCK" at 1975,1612.5 h60
  text "MOSI" at 1975,1512.5 h60
  text "STAT" at 535,1497.5 h40
  text "MISO" at 1975,1412.5 h60
  text "TX3" at 1975,1312.5 h60
  text "RX3" at 1975,1212.5 h60
  text "TX2" at 1975,1112.5 h60
  text "RX2" at 1975,1012.5 h60
  text "IGN_C3" at 0,1000 h60
  text "TX1" at 1975,912.5 h60
  text "IGN_C2" at 0,900 h60
  text "RX1" at 1975,812.5 h60
  text "IGN_C1" at 0,800 h60
  text "SDA0" at 1975,712.5 h60
  text "IGN3_2" at 12.5,700 h60
  text "SCL" at 1975,612.5 h60
  text "IGN3_1" at 12.5,600 h60
  text "GND" at 1973.31,521.65 h60
  text "IGN2_2" at 12.5,500 h60
  text "LIPO" at 1975,412.5 h60
  text "IGN2_1" at 12.5,400 h60
  text "3V3_2" at 1975,312.5 h60
  text "IGN1_2" at 12.5,300 h60
  text "PWR" at 1560,260 h40
  text "3V3" at 1975,212.5 h60
  text "IGN1_1" at 12.5,200 h60
Bottom Overlay:
  text "UBC Rocket Avionics / MCU module rev 2 / Callum O'Riley, 2024" at 1775,37.5 h40